# Altium PCB PCB.PcbDoc
Units mm, origin at the board's own origin, x right, y up, seen from the top; angles counter-clockwise.
Board outline 100.33 x 50.8 mm, 2 copper layers (Top Layer, Bottom Layer); 40 components, 32 nets, 94 pads, 8 vias.
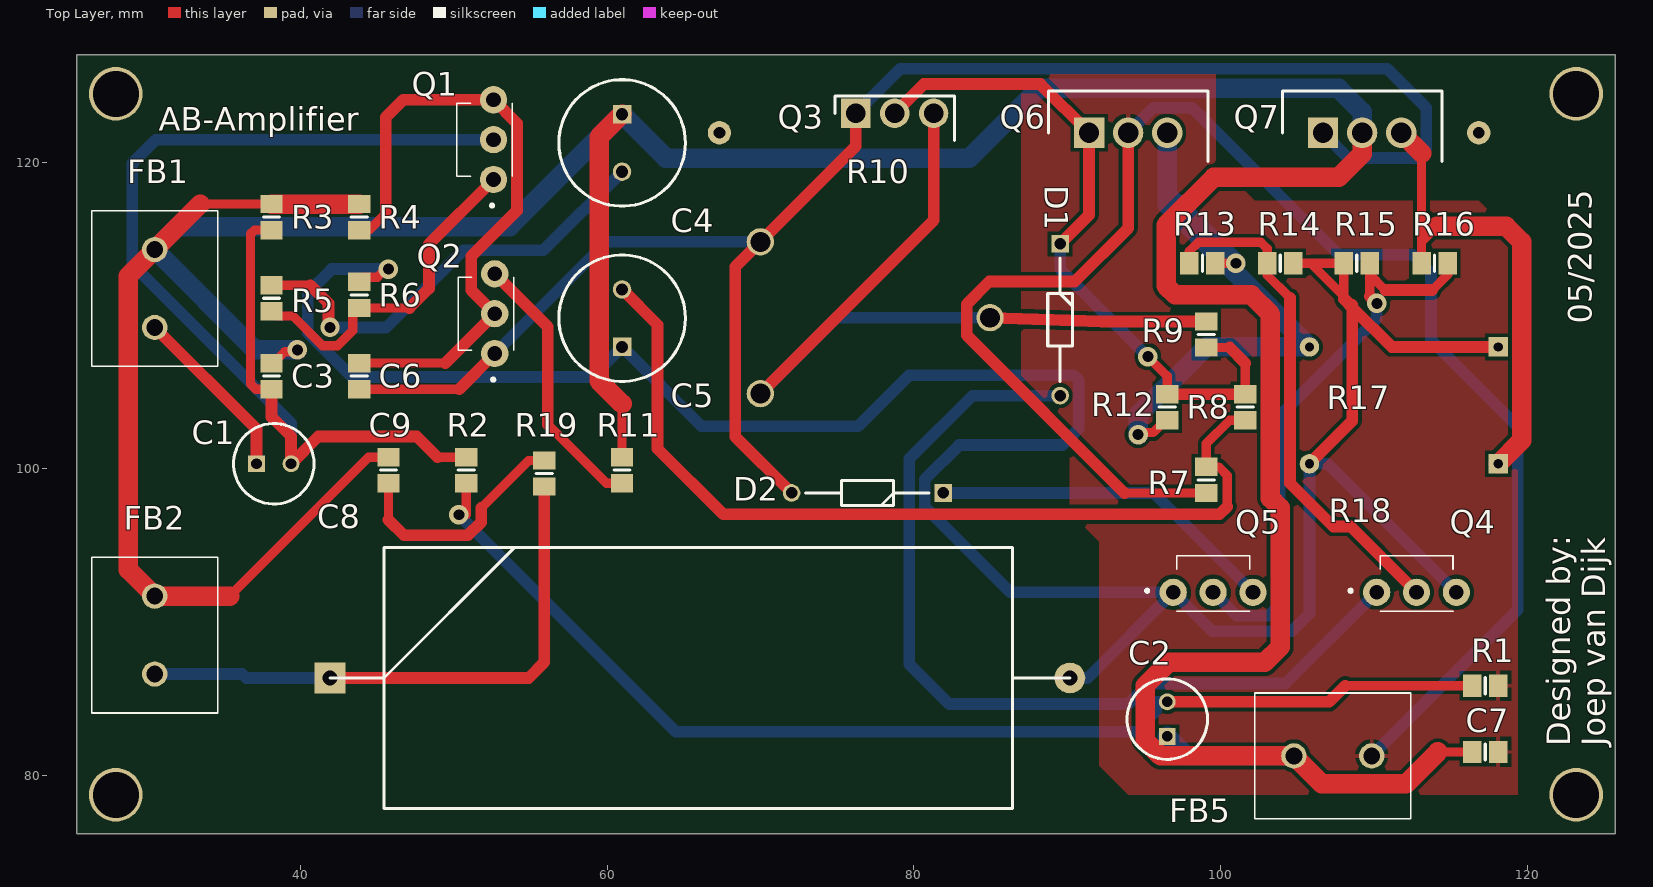
[diagram p0: Top Layer view]
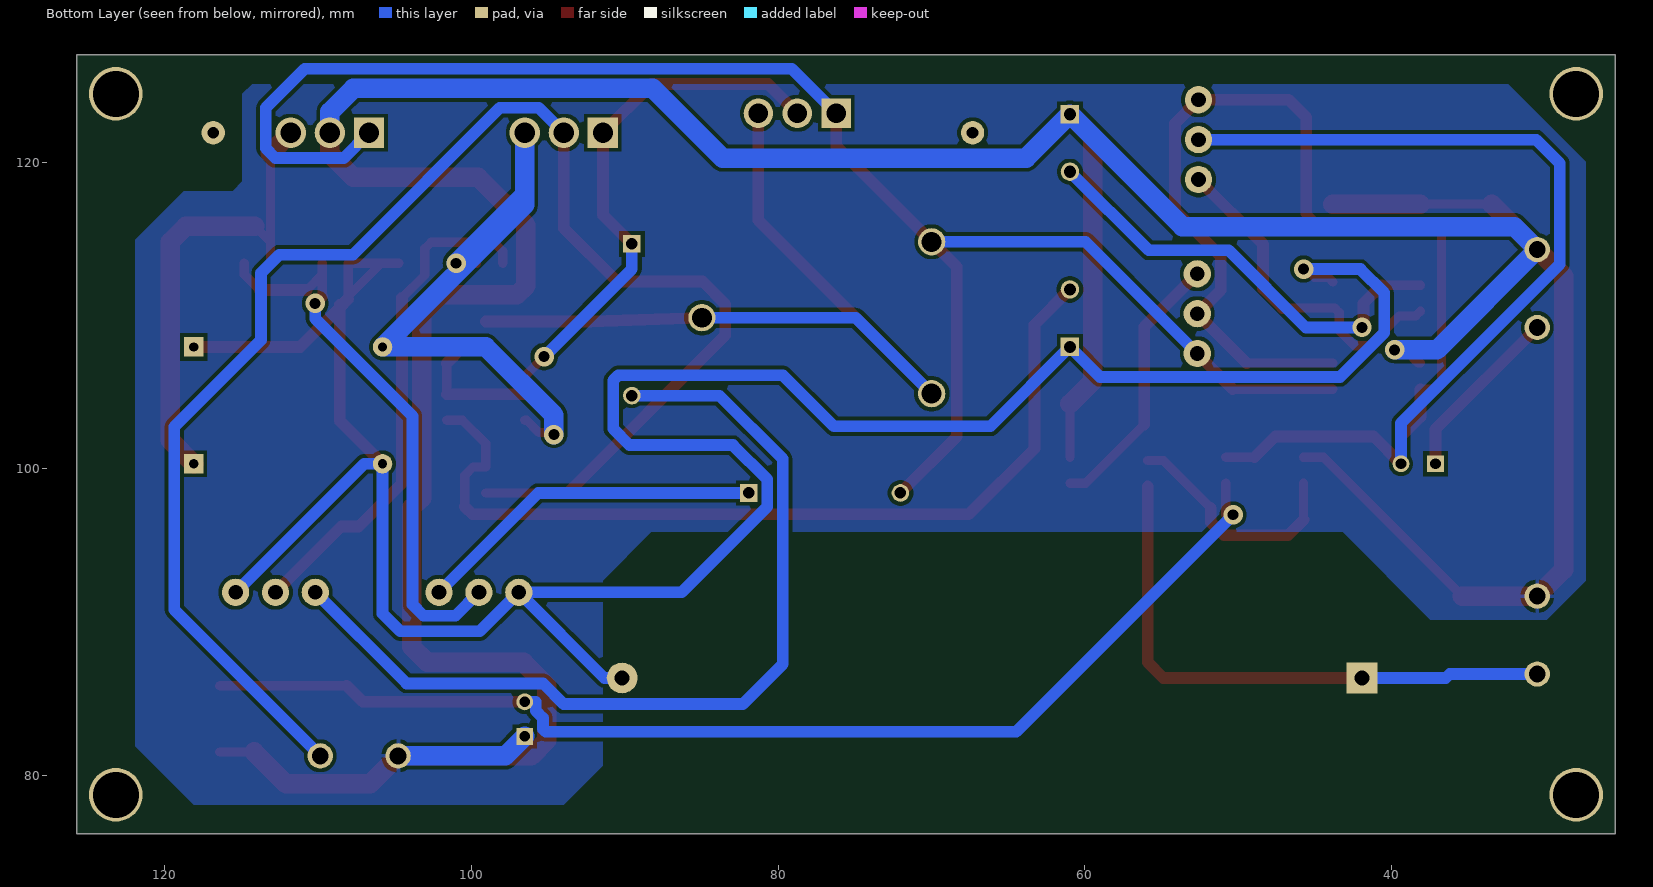
[diagram p1: Bottom Layer view, seen from below]
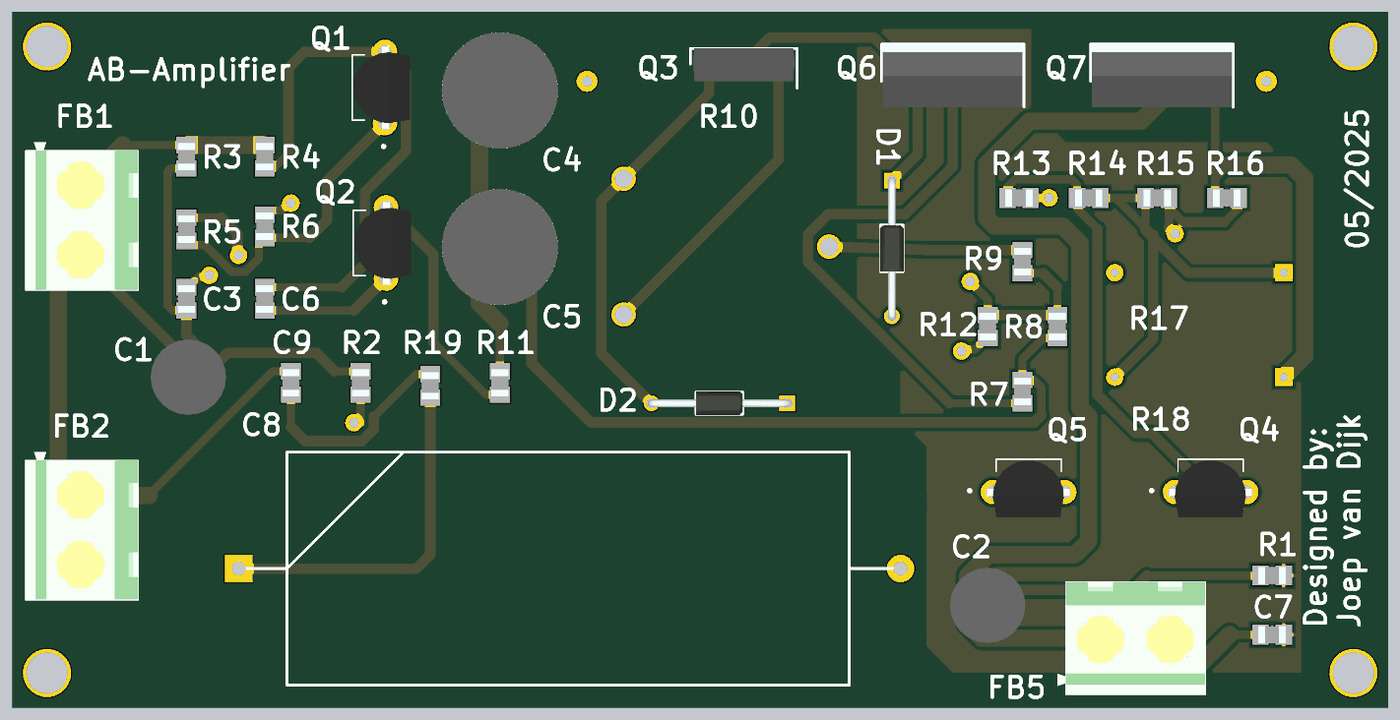
[diagram p2: 3D render of the assembled board from above, using the file's embedded part models]

## Layer stack, top to bottom
Top Solder: solder mask 0.0102, Solder Resist, Dk 3.5
Top Layer: signal copper 0.0356
Dielectric 1: dielectric 0.32, FR-4, Dk 4.8
Bottom Layer: signal copper 0.0356
Bottom Solder: solder mask 0.0102, Solder Resist, Dk 3.5

## Board outline
25.4,76.2 125.73,76.2 125.73,127 25.4,127

## Design rules (kind name [scope] priority, off if disabled: settings)
Clearance [All] p1: gap=0.254 ignorepadtopadclearanceinfootprint=FALSE
PolygonConnect [All] p1: connectstyle=Relief reliefconductorwidth=0.254 reliefentries=4 polygonreliefangle="90 Angle" airgapwidth=0.254
RoutingVias [All] p1: holewidth=0.711 width=1.27 viastyle="Through Hole" minholewidth=0.711 minwidth=1.27 maxholewidth=0.711 maxwidth=1.27
SMDNeckDown [All] p1: percent=50.000
SolderMaskExpansion [All] p1: expansion=0.102 istentingtop=FALSE
SupplyNets "Schematic Supply Nets_1" [InNet('VCC')] p1: voltage=0.000
SupplyNets "Schematic Supply Nets" [InNet('GND')] p2: voltage=0.000
Width NetQ7_3 [InNet('NetQ7_3')] p1: maxlimit=1.27 minlimit=0.254 preferedwidth=1.27 minimp=50.000000 maximp=50.000000 favimp=50.000000
Width NetQ8_1 [InNet('NetQ8_1')] p2: maxlimit=1.27 minlimit=0.254 preferedwidth=1.27 minimp=50.000000 maximp=50.000000 favimp=50.000000
Width NetQ8_2 [InNet('NetQ8_2')] p3: maxlimit=1.27 minlimit=0.254 preferedwidth=1.27 minimp=50.000000 maximp=50.000000 favimp=50.000000
Width NetQ6_3 [InNet('NetQ6_3')] p4: maxlimit=1.27 minlimit=0.254 preferedwidth=1.27 minimp=50.000000 maximp=50.000000 favimp=50.000000
Width GND [InNet('GND')] p5: maxlimit=1.27 minlimit=0.254 preferedwidth=1.27 minimp=50.000000 maximp=50.000000 favimp=50.000000
Width ALL [All] p6: maxlimit=1.27 minlimit=0.254 preferedwidth=0.762 minimp=50.000000 maximp=50.000000 favimp=50.000000
Width VCC [InNet('VCC')] p7: maxlimit=1.27 minlimit=0.508 preferedwidth=1.27 minimp=50.000000 maximp=50.000000 favimp=50.000000
30 further rules are at their usual default settings.

## Components (designator, comment, footprint, x,y, rotation, side; value= is the part's Value field where it differs from the comment)
C1 "1.0uF +" 106CKR050M 37.12,100.33 r0 top
C2 "10uF +" 106CKR050M 96.52,82.55 r90 top
C3 "47pF" 0805 38.1,106.045 r270 top
C4 "100uF +" 107CKR050M 60.96,123.13 r270 top
C5 "100uF +" 107CKR050M 60.96,107.95 r90 top
C6 "20pF" 0805 43.815,106.045 r270 top
C7 "0.1 µF" 0805 117.26,81.534 r0 top
C8 "2200uF +" 2200cap 41.91,86.36 r0 top
C9 "0.1 µF" 0805 45.72,99.91 r270 top
D1 "1N4148W-7-F" 1N4148 89.535,114.675 r270 top
D2 "1N4148W-7-F" 1N4148 81.915,98.425 r180 top
FB1 "Connector" Connector 30.48,109.22 r90 top
FB2 "Connector" Connector 30.48,86.614 r90 top
FB5 "Connector" Connector 109.855,81.28 r180 top
Q1 "BC557CG" BC557 51.993,120.572 r90 top
Q2 "BC547BG" BC547 52.07,109.22 r90 top
Q3 "BD139G" BD139 76.2,123.19 r0 top
Q4 "BC547BG" BC547 111.876,92.533 r0 top
Q5 "BC557CG" BC557 98.608,92.533 r0 top
Q6 "BDW93C" BDW94C 91.42,121.92 r0 top
Q7 "BDW94C" BDW94C 106.68,121.92 r0 top
R1 "CRCW080510R0FKEA" 0805 117.26,85.852 r0 top
R2 "CRCW080510R0FKEA" 0805 50.8,99.91 r270 top
R3 "CRCW080510R0FKEA" 0805 38.1,116.42 r270 top
R4 "CRCW080510R0FKEA" 0805 43.815,116.42 r270 top
R5 "CRCW080510R0FKEA" 0805 38.1,111.125 r270 top
R6 "CRCW080510R0FKEA" 0805 43.815,111.34 r270 top
R7 "CRCW080510R0FKEA" 0805 99.06,99.275 r270 top
R8 "CRCW080510R0FKEA" 0805 101.6,104.023 r270 top
R9 "CRCW080510R0FKEA" 0805 99.06,108.761 r270 top
R10 "249FGJSPXB25503KA" "Potentiometer 15mm" 77.47,109.855 r270 top
R11 "CRCW080510R0FKEA" 0805 60.96,99.91 r90 top
R12 "CRCW080510R0FKEA" 0805 96.52,104.023 r90 top
R13 "CRCW080510R0FKEA" 0805 98.806,113.411 r180 top
R14 "CRCW080510R0FKEA" 0805 103.886,113.411 r0 top
R15 "CRCW080510R0FKEA" 0805 108.878,113.411 r0 top
R16 "CRCW080510R0FKEA" 0805 113.958,113.411 r0 top
R17 "RK73B2ATTD224J" "0.33 1W" 118.11,107.95 r180 top
R18 "RK73B2ATTD224J" "0.33 1W" 118.11,100.33 r180 top
R19 "CRCW080510R0FKEA" 0805 55.88,99.695 r90 top

## Footprints (in the part's own frame and the unit in brackets; to place one, negate y for a bottom-side part, rotate by r counter-clockwise, add the part's x,y. Pads: shape width x height; smd on the part's side, far side on the other; paste and mask are expansions set on the pad)
"0.33 1W" [mm]
  rect 1.27x1.27 hole 0.6: 1(0,0)
  round 1.27 hole 0.6: 2(12.319,0)
  body extent 1.14,-1.78 11.18,1.78, height 0.25
1N4148 [mm]
  rect 1.15x1.15 hole 0.75: 1(0,0)
  round 1.15 hole 0.75: 2(9.9,0)
  silkscreen extent 0.93,-0.81 8.97,0.81, body extent -0.28,-0.87 10.18,0.87, height 1.75
106CKR050M [mm] "10uF"
  rect 1.1x1.1 hole 0.7: 1(0,0)
  round 1.1 hole 0.7: 2(2.25,0)
  silkscreen extent -1.5,-2.62 3.75,2.62, body extent -1.61,-2.75 3.88,2.75, height 12.5
107CKR050M [mm] "100uF"
  rect 1.2x1.2 hole 0.8: 1(0,0)
  round 1.2 hole 0.8: 2(3.75,0)
  silkscreen extent -2.25,-4.13 6,4.13, body extent -2.36,-4.25 6.12,4.25, height 13
0805 [mm]
  rect 1.2x1.45 smd: 1(-0.85,0) 2(0.85,0)
  silkscreen extent 0,-0.53 0,0.53, body extent -1,-0.63 1,0.63, height 1.05
2200cap [mm]
  rect 2x2 hole 1: 1(0,0)
  round 2 hole 1: 2(48.26,0)
  silkscreen extent 0,-8.5 48.26,8.5, body extent 0,-8.99 48.26,8.99, height 0.25
BC547 [mm]
  round 1.778 hole 0.96: 1(-1.7,-0.585) 2(0.9,-0.585) 3(3.5,-0.585)
  silkscreen extent -3.5,-1.81 3.28,1.81, body extent -2.2,-2.42 3.96,1.71, height 8.67
BC557 [mm]
  round 1.778 hole 0.96: 1(-1.7,-0.585) 2(0.9,-0.585) 3(3.5,-0.585)
  silkscreen extent -3.5,-1.81 3.28,1.81, body extent -2.2,-2.42 3.96,1.71, height 8.67
BD139 [mm]
  rect 1.92x1.92 hole 1.28: 1(0,0)
  round 1.92 hole 1.28: 2(2.54,0) 3(5.08,0)
  silkscreen extent -1.36,-1.76 6.44,1.14, body extent -1.16,-1.27 6.24,1.13, height 13.08
BDW94C [mm]
  rect 1.98x1.98 hole 1.32: 1(0,0)
  round 1.98 hole 1.32: 2(2.55,0) 3(5.1,0)
  silkscreen extent -2.65,-1.88 7.75,2.72, body extent -2.55,-1.88 7.65,2.72, height 20.08
Connector [mm]
  round 1.65 hole 1.1: 1(0,0) 2(5.08,0)
  silkscreen extent -2.54,-4.1 7.62,4.1, body extent -2.51,-4.11 8.25,4.09, height 9.84
"Potentiometer 15mm" [mil]
  round 70 hole 51.18: 1(-195,-295) 2(0,295) 3(195,-295)
  body extent -320,-349 320,345, height 10

## Part data
C1: library part "Elco - 1.0uF"
C2: library part "Elco - 10uF"
C3 C6 C7 C9: library part "Capasitor - 0805"
C4 C5: library part "Elco - 100uF"
C8: library part "Elco - 2000uF"
D1 D2: library part "Diode - 1N4148", "Fast Switching Diode, 100 V, 0.15 A, -65 to 150 degC, 2-Pin?SOD123, RoHS, Tape and Reel", If - Forward Current=0.15A, Ir - Reverse Current=1uA, Manufacturer=DiodesIncorporated, Max Surge Current=2A, Maximum Operating Temperature=+150C, Minimum Operating Temperature=-65C, Operating Temperature Range=-65Cto+150C, Package / Case=SOD-123, Package Reference=SOD123-2, Peak Reverse Voltage=100V, Vf - Forward Voltage=1.25V, Brand=DiodesIncorporated, Configuration=Single, Datasheet URL=http://www.farnell.com/datasheets/1915529.pdf, Datasheet Version="Rev. 24-2, 10/2013", Factory Pack Quantity=3000, Height=1.25mm, Length=2.85mm, Manufacturer URL=http://www.diodes.com/, Mounting Style=SMD/SMT, Package URL=http://www.diodes.com/datasheets/ds18004.pdf, Packaging=Reel, Product=SwitchingDiodes, Product Category=Diodes-GeneralPurpose,Power,Switching, Recovery Time=4ns, RoHS=True, Series=1N4148, Type=SwitchingDiode, Unit Weight=0.000353oz, Width=1.7mm
FB1 FB2 FB5: "Ferrite Bead", Arrow Part Number=ACML-0805-500-T, Manufacturer_Name=ABRACON, Mouser Part Number=815-ACML-0805-500T, Arrow Price/Stock=https://www.arrow.com/en/products/acml-0805-500-t/abracon, Datasheet Link=https://abracon.com/Magnetics/new/ACML-0805.pdf, Height=1.05mm, Manufacturer_Part_Number=ACML-0805-500-T, Mouser Price/Stock=https://www.mouser.co.uk/ProductDetail/ABRACON/ACML-0805-500-T?qs=qw2lGDycG5tBjukxHQX6NA%3D%3D
Q1: library part "Transistor - BC557_1", "Amplifier Transistor, PNP Silicon, 3-Pin TO-92, Pb-Free, Bulk Box", Manufacturer="On Semiconductor", ComponentLink1Description="Manufacturer URL", ComponentLink1URL=http://www.onsemi.com/, ComponentLink2Description=Datasheet, ComponentLink2URL=http://www.onsemi.com/pub_link/Collateral/BC556B-D.PDF, ComponentLink3Description="Package Specification", ComponentLink3URL=http://www.onsemi.cn/pub_link/Collateral/2N6426-D.PDF, DatasheetVersion="Rev. 3", IC Continuous (A)=-0.1, Mounting Technology="Through Hole", PackageDescription="3-Pin Transistor Outline, Body 4.825 x 3.685 mm, Pitch 1.27 mm", PackageReference=TO-92-3-29-11_AM_SL, PackageVersion="Rev. AM", Packing="Bulk Box", PartNumber=BC557CG, Polarity=PNP, RoHS=TRUE
Q2: library part "Transistor - BC547_1", "Amplifier Transistor, NPN Silicon, 3-Pin TO-92, Pb-Free, Bulk Box", Manufacturer="On Semiconductor", ComponentLink1Description="Manufacturer URL", ComponentLink1URL=http://www.onsemi.com/, ComponentLink2Description=Datasheet, ComponentLink2URL=http://www.onsemi.com/pub_link/Collateral/BC546-D.PDF, ComponentLink3Description="Package Specification", ComponentLink3URL=http://www.onsemi.cn/pub_link/Collateral/2N6426-D.PDF, DatasheetVersion="Rev. 7", fT Min (MHz)=150, IC Continuous (A)=0.1, Mounting Technology="Through Hole", PackageDescription="3-Pin Transistor Outline, Body 4.825 x 3.685 mm, Pitch 1.27 mm", PackageReference=TO-92-3-29-11_AM_SL, PackageVersion="Rev. AM", Packing="Bulk Box", PartNumber=BC547BG, Polarity=NPN, RoHS=TRUE
Q3: library part "Transistor - BD139", Case/Package=TO-225, Collector Base Voltage (VCBO)=80V, Collector Emitter Saturation Voltage=500mV, Current Rating=1.5A, Emitter Base Voltage (VEBO)=5V, Manufacturer Lifecycle Status=ACTIVE, Max Junction Temperature (Tj)=150°C, Max Power Dissipation=1.25W, Min Operating Temperature=-55°C, Collector Emitter Breakdown Voltage=80V, Collector Emitter Voltage (VCEO)=80V, Contact Plating=Tin, Element Configuration=Single, Height=11.04mm, hFE Min=25, Lead Free="Lead Free", Length=7.74mm, Lifecycle Status=Production, Max Collector Current=1.5A, Max Operating Temperature=150°C, NexarPartId=354669, Number of Elements=1, Number of Pins=3, Packaging=Bulk, Polarity=NPN, Power Dissipation=1.25W, Radiation Hardening=No, REACH SVHC="No SVHC", RoHS=Compliant, Schedule B="8541290080, 8541290080|8541290080, 8541290080|8541290080|8541290080, 8541290080|8541290080|8541290080|8541290080", Voltage Rating (DC)=80V, Weight=4.535924g, Width=2.66mm
Q4: library part "Transistor - BC547", "Amplifier Transistor, NPN Silicon, 3-Pin TO-92, Pb-Free, Bulk Box", Manufacturer="On Semiconductor", ComponentLink1Description="Manufacturer URL", ComponentLink1URL=http://www.onsemi.com/, ComponentLink2Description=Datasheet, ComponentLink2URL=http://www.onsemi.com/pub_link/Collateral/BC546-D.PDF, ComponentLink3Description="Package Specification", ComponentLink3URL=http://www.onsemi.cn/pub_link/Collateral/2N6426-D.PDF, DatasheetVersion="Rev. 7", fT Min (MHz)=150, IC Continuous (A)=0.1, Mounting Technology="Through Hole", PackageDescription="3-Pin Transistor Outline, Body 4.825 x 3.685 mm, Pitch 1.27 mm", PackageReference=TO-92-3-29-11_AM_SL, PackageVersion="Rev. AM", Packing="Bulk Box", PartNumber=BC547BG, Polarity=NPN, RoHS=TRUE
Q5: library part "Transistor - BC557", "Amplifier Transistor, PNP Silicon, 3-Pin TO-92, Pb-Free, Bulk Box", Manufacturer="On Semiconductor", ComponentLink1Description="Manufacturer URL", ComponentLink1URL=http://www.onsemi.com/, ComponentLink2Description=Datasheet, ComponentLink2URL=http://www.onsemi.com/pub_link/Collateral/BC556B-D.PDF, ComponentLink3Description="Package Specification", ComponentLink3URL=http://www.onsemi.cn/pub_link/Collateral/2N6426-D.PDF, DatasheetVersion="Rev. 3", IC Continuous (A)=-0.1, Mounting Technology="Through Hole", PackageDescription="3-Pin Transistor Outline, Body 4.825 x 3.685 mm, Pitch 1.27 mm", PackageReference=TO-92-3-29-11_AM_SL, PackageVersion="Rev. AM", Packing="Bulk Box", PartNumber=BC557CG, Polarity=PNP, RoHS=TRUE
Q6: library part "Transistor - BDW93C", "BDW93C BDW93C Series 100 V 12 A 80 W NPN Darlington Transistor - TO-220-3", Case/Package=TO-220-3, Collector Base Voltage (VCBO)=100V, Collector Emitter Saturation Voltage=2V, Current Rating=12A, Emitter Base Voltage (VEBO)=12V, Manufacturer Lifecycle Status="LAST SHIPMENTS", Max Junction Temperature (Tj)=150°C, Max Power Dissipation=80W, Min Operating Temperature=-65°C, Collector Emitter Breakdown Voltage=100V, Collector Emitter Voltage (VCEO)=100V, Contact Plating=Tin, Element Configuration=Single, Height=9.4mm, hFE Min=750, Lead Free="Lead Free", Length=10.1mm, Lifecycle Status=EOL, Max Collector Current=12A, Max Operating Temperature=150°C, Mount="Through Hole", NexarPartId=84324666, Number of Elements=1, Number of Pins=3, Packaging=Bulk, Polarity=NPN, Power Dissipation=80W, Radiation Hardening=No, REACH SVHC="No SVHC", RoHS=Compliant, Schedule B="8541290080, 8541290080|8541290080, 8541290080|8541290080|8541290080, 8541290080|8541290080|8541290080|8541290080", Voltage Rating (DC)=100V, Weight=1.8g, Width=4.7mm
Q7: library part "Transistor - BDW94C", "Transistor BJT PNP", Manufacturer_Name=STMicroelectronics, Mouser Part Number=511-BDW94C, Arrow Part Number=BDW94C, Arrow Price/Stock=https://www.arrow.com/en/products/bdw94c/stmicroelectronics?utm_currency=USD&region=nac, Datasheet Link=http://www.st.com/web/en/resource/technical/document/datasheet/CD00000925.pdf, Height=4.6mm, Manufacturer_Part_Number=BDW94C, Mouser Price/Stock=https://www.mouser.co.uk/ProductDetail/STMicroelectronics/BDW94C?qs=ljbEvF4DwOM3QQOPDay3pQ%3D%3D
R1 R2 R3 R4 R5 R6 R7 R8 R9 R11 R12 R13 R14 R15 R16 R19: library part "Resistor 0805", Manufacturer="Vishay Dale", Part Number=CRCW080510R0FKEA
R10: library part Potentiometer, "249FGJSPXB25503KA Res Cermet POT 50K Ohm 20% 1W 1(Elec)/1(Mech)Turn 6.35mm Pin Panel Mount/Through Hole Bulk", Insulation Resistance=1GΩ, Max Operating Temperature=125°C, Min Operating Temperature=-55°C, Power Rating=1W, Resistance=50kΩ, Temperature Coefficient=100ppm/°C, Tolerance=10%, Voltage Rating=224V, Composition="Cermet, Potentiometer", Contact Plating=Tin, Depth=12.7mm, Height=13.11mm, Hole Diameter=9.525mm, Length=12.7mm, Military Standard=Not, Mount="Panel, Through Hole", NexarPartId=42669055, Number of Gangs=1, Number of Turns=1, REACH SVHC=Unknown, RoHS=Compliant, Termination=Pin, Type=Potentiometer, Width=12.7mm
R17 R18: library part "Resistor - 1W Through Hole", Manufacturer="KOA Speer", Part Number=RK73B2ATTD224J

## Free pads (board coordinates)
  round 3.5 hole 3: 4(27.94,78.74) 4(27.94,124.46) 4(123.19,78.74) 4(123.19,124.46)
  round 1.524 hole 0.762: 4(67.31,121.92) 4(116.84,121.92)

## Via types
v1: diameter 1.27, hole 0.711, Top Layer to Bottom Layer, 8 vias

## Nets (pads, with @x,y where several pads share a name; then routed paths per layer and width w, separated by ;. In a path a pad name is that pad's centre, name@x,y a point inside that pad or via, vN(x,y) a via of type N, cw(c..) or ccw(c..) an arc to the next point about the centre after c; other vN are vias at no path point)
GND: C2.1 C3.1 C4.1 C7.1 C9.1 FB1.2 FB2.2 FB5.2 Q7.2 R3.1 R4.1 R11.2 | length 277.9
  Top Layer w0.6: 33.45,117.27 R3.1 ; 35.359,91.694 44.425,100.76 C9.1 ; C3.1 38.225,106.895 38.962,107.632 39.65,107.632 v1(39.778,107.76) ; R11.2 60.96,104.242 ; 114.173,81.534 C7.1
  Top Layer w1.27: 33.45,117.27 FB1.2 28.753,112.573 28.753,93.421 FB2.2 35.359,91.694 ; R3.1 R4.1 ; 60.96,104.242 59.461,105.74 59.461,121.631 C4.1 ; Q7.2 109.23,120.543 107.696,119.009 99.553,119.009 96.444,115.9 96.444,111.938 97.028,111.354 101.992,111.354 103.251,110.094 103.251,98.096 103.886,97.461 103.886,88.392 102.87,87.376 96.596,87.376 95.072,85.852 95.072,82.296 96.088,81.28 FB5.2 106.604,79.451 112.09,79.451 114.173,81.534
  Bottom Layer w1.27: v1(39.778,107.76) 37.02,107.76 FB1.2 31.979,115.799 53.629,115.799 C4.1 63.821,120.269 83.617,120.269 88.163,124.815 107.697,124.815 109.23,123.282 Q7.2 ; C2.1 97.79,81.28 FB5.2
"Net C8_1": C8.1 FB2.1 R19.1 | length 37.4
  Top Layer w0.762: C8.1 54.864,86.36 55.88,87.376 R19.1
  Bottom Layer w0.762: FB2.1 36.195,86.614 36.449,86.36 C8.1
"Net C8_2": C5.1 C8.2 Q4.3 Q5.1 R6.1 R14.2 R15.1 R17.1 R18.2 | length 176.2
  Top Layer w0.6: R6.1 44.115,112.49 44.999,112.49 45.539,113.03 v1(45.72,113.03) ; R14.2 105.879,113.411 ; 108.028,111.074 108.028,111.262 ; 108.585,110.705 108.028,111.262 ; 105.879,113.411 108.028,111.262 ; 105.879,113.411 R15.1 108.028,111.262
  Top Layer w0.762: R18.2 108.585,103.124 108.585,110.517 ; 108.028,111.074 108.585,110.517 ; 108.585,110.705 108.585,110.517 ; R17.1 111.152,107.95 108.585,110.517
  Bottom Layer w0.762: v1(45.72,113.03) 42.012,113.03 40.462,111.481 40.462,108.872 43.34,105.994 59.004,105.994 C5.1 66.142,102.768 76.352,102.768 79.68,106.096 90.424,106.096 90.754,105.766 90.754,102.616 89.687,101.549 82.94,101.549 80.705,99.314 80.705,97.527 86.284,91.948 Q5.1 ; C8.2 91.32,86.36 Q5.1 ; Q4.3 106.994,100.33 R18.2 105.791,90.551 104.648,89.408 99.448,89.408 Q5.1
NetBR1_1: 
NetBR1_2: 
NetBR1_3: 
NetC1_1: C1.1 FB1.1 | length 11.6
  Top Layer w0.762: FB1.1 37.12,102.58 C1.1
NetC1_2: C1.2 C3.2 Q1.2 R2.1 R3.2 | length 79
  Top Layer w0.6: C3.2 37.084,105.195 36.728,105.551 36.728,115.316 36.982,115.57 R3.2 ; 48.922,100.76 R2.1
  Top Layer w0.762: C3.2 38.1,103.378 39.37,102.108 C1.2 41.148,102.108 47.574,102.108 48.922,100.76
  Bottom Layer w0.762: C1.2 39.37,102.972 29.007,113.335 29.007,119.939 30.54,121.472 Q1.2
NetC2_2: C2.2 R1.1 R2.2 | length 76.5
  Top Layer w0.6: v1(50.317,97.003) 50.8,97.003 R2.2 ; 108.131,85.852 R1.1
  Top Layer w0.762: C2.2 107.079,84.8 108.131,85.852
  Bottom Layer w0.762: v1(50.317,97.003) 64.465,82.855 95.148,82.855 95.326,83.033 95.326,83.744 95.809,84.226 95.809,84.8 C2.2
NetC4_2: C4.2 R5.1 | length 29.1
  Top Layer w0.6: R5.1 40.628,111.975
  Top Layer w0.762: 40.628,111.975 41.813,110.79 41.813,109.317 v1(41.91,109.22)
  Bottom Layer w0.762: v1(41.91,109.22) 45.568,109.22 50.597,114.249 55.829,114.249 C4.2
NetC5_2: C5.2 R7.1 R8.2 | length 58.8
  Top Layer w0.6: 100.432,97.536 100.432,99.568 99.875,100.125 R7.1 99.06,101.649 100.584,103.173 R8.2
  Top Layer w0.762: C5.2 63.271,109.389 63.271,101.321 67.564,97.028 99.924,97.028 100.432,97.536
NetC6_1: C6.1 Q1.3 Q2.2 R4.2 | length 42.6
  Top Layer w0.6: C6.1 49.43,106.895 ; R4.2 44.45,115.57 45.542,116.662
  Top Layer w0.762: 45.542,116.662 45.542,122.936 46.678,124.072 Q1.3 54.102,122.548 54.102,116.84 51.13,113.868 51.13,111.645 Q2.2 49.43,106.895
NetC6_2: C6.2 D2.2 Q2.1 Q3.1 Q7.1 R10.1 | length 109.5
  Top Layer w0.6: C6.2 50.33,105.195
  Top Layer w0.762: 50.33,105.195 Q2.1 ; D2.2 68.351,102.089 68.351,113.182 R10.1 76.2,121.031 Q3.1
  Bottom Layer w0.762: Q2.1 59.943,114.808 R10.1 ; Q3.1 79.095,126.085 110.872,126.085 113.411,123.546 113.411,120.904 112.776,120.269 108.331,120.269 Q7.1
NetC9_2: C9.2 R19.2 | length 15.5
  Top Layer w0.6: 45.72,96.675 C9.2 ; 51.769,97.449 54.864,100.545 R19.2
  Top Layer w0.762: 45.72,96.675 46.736,95.659 50.908,95.659 51.769,96.52 51.769,97.449
NetD1_1: D1.1 Q3.2 Q6.1 R8.1 R9.2 R12.2 | length 45.6
  Top Layer w0.6: v1(95.25,107.315) 96.52,106.045 R12.2 ; R9.2 100.584,107.911 ; R8.1 101.6,106.895
  Top Layer w0.762: Q3.2 80.645,125.095 88.245,125.095 Q6.1 91.42,116.56 D1.1 ; R12.2 R8.1 ; 100.584,107.911 101.6,106.895
  Bottom Layer w0.762: D1.1 89.535,113.03 v1(95.25,107.315)
NetD1_2: D1.2 Q4.1 | length 59.5
  Bottom Layer w0.762: D1.2 83.813,104.775 79.689,100.651 79.689,87.265 82.296,84.658 93.98,84.658 95.326,86.004 104.232,86.004 Q4.1
NetD2_1: D2.1 Q5.3 | length 22.9
  Bottom Layer w0.762: D2.1 95.631,98.425 Q5.3
NetFB4_2: 
NetQ1_1: Q1.1 R5.2 R6.2 | length 22.3
  Top Layer w0.6: R5.2 38.4,109.975 39.473,109.975 41.418,108.031 42.402,108.031 43.39,109.019 43.39,110.19 43.69,110.49 47.092,110.49
  Top Layer w0.762: 47.092,110.49 48.362,111.76 48.362,114.656 Q1.1
NetQ2_3: Q2.3 R11.1 | length 17.7
  Top Layer w0.6: 56.109,102.895 59.944,99.06 R11.1
  Top Layer w0.762: Q2.3 56.109,109.266 56.109,102.895
NetQ3_3: Q3.3 R9.1 R10.2 R10.3 | length 54.1
  Top Layer w0.762: R10.3 81.28,116.205 Q3.3 ; R10.2 92.243,109.611 R9.1
  Bottom Layer w0.762: R10.3 74.93,109.855 R10.2
NetQ4_2: Q4.2 R13.2 R14.1 | length 33.4
  Top Layer w0.6: R13.2 97.956,114.187 98.552,114.783 102.616,114.783 103.036,114.363 R14.1 103.036,112.635 104.521,111.15
  Top Layer w0.762: 104.521,111.15 104.521,99.06 107.34,96.241 108.483,96.241 Q4.2
NetQ5_2: Q5.2 R15.2 R16.2 | length 37
  Top Layer w0.6: 109.728,111.252 109.728,112.674 ; R15.2 109.728,112.674 ; 110.744,111.658 109.728,112.674 ; 113.792,111.658 114.808,112.674 R16.2
  Top Layer w0.762: 109.728,111.252 v1(110.185,110.795) ; 110.744,111.658 113.792,111.658
  Bottom Layer w0.762: Q5.2 101.032,90.424 103.124,90.424 103.835,91.135 103.835,103.429 110.185,109.779 v1(110.185,110.795)
NetQ6_3: Q6.3 R12.1 R13.1 R17.2 | length 42
  Top Layer w0.6: v1(94.615,102.235) 94.743,102.363 95.585,102.363 96.395,103.173 R12.1 ; R13.1 v1(100.99,113.411)
  Bottom Layer w1.27: v1(94.615,102.235) 94.615,103.503 99.062,107.95 R17.2 96.52,117.221 96.52,117.881 ; Q6.3 96.52,117.881 ; v1(100.99,113.411) 96.52,117.881
NetQ7_3: Q7.3 R16.1 R18.1 | length 31.5
  Top Layer w0.6: R16.1 113.108,114.808 ; 113.108,120.592 113.108,114.808 ; 114.124,115.824 113.108,114.808
  Top Layer w1.27: Q7.3 113.108,120.592 ; 114.124,115.824 118.618,115.824 119.634,114.808 119.634,101.854 R18.1
NetQ8_1: 
NetQ8_2: 
NetQ8_3: 
NetQ9_1: 
NetR22_1: 
NetR23_3: 
VCC: C7.2 FB5.1 Q6.2 R1.2 R7.2 | length 103.4
  Top Layer w0.6: 93.726,98.425 R7.2
  Top Layer w0.762: 93.726,98.425 83.439,108.712 83.439,110.744 84.912,112.217 90.493,112.217 93.97,115.694 Q6.2
  Bottom Layer w0.762: Q6.2 95.595,123.545 98.146,123.545 107.721,113.97 112.522,113.97 113.716,112.776 113.716,108.407 119.38,102.743 119.38,90.805 FB5.1

## Polygon pours and split planes (outlines as drawn)
VCC on Top Layer "VCC_L01_P002" (solid, pour order 2): 87.63,125.73 99.695,125.73 99.695,120.015 102.235,117.475 116.84,117.475 119.38,114.935 119.38,78.74 93.98,78.74 92.075,80.645 92.075,95.25 90.17,97.155 90.17,101.6 86.995,104.775 86.995,125.095
no net on Top Layer "NONET_L01_P001" (solid, pour order 1): 92.075,99.695 89.535,102.235 91.44,100.33
GND on Bottom Layer "GND_L02_P004" (solid, pour order 4): 27.305,120.015 32.385,125.095 114.3,125.095 114.935,124.46 114.935,118.745 115.57,118.11 118.745,118.11 121.92,114.935 121.92,81.915 118.11,78.105 93.98,78.105 91.44,80.645 91.44,92.71 88.265,95.885 43.18,95.885 37.465,90.17 29.845,90.17 27.305,92.71

## Silkscreen, mask and mechanical layers (free items; w line width, h text height)
Top Overlay:
  text "AB-Amplifier" at 30.734,122.047 h1.52
  text "05/2025" at 124.206,109.474 h1.52 r90
  text "Designed by:  / Joep van Dijk" at 125.095,81.915 h1.52 r90
  text "05/2025 / Designed by: Joep van Dijk" at 220.98,-16.51 h1.52